# Altium PCB VESC_JLC.PcbDoc (part 3 of 3)
Units mm, origin at the board's own origin, x right, y up, seen from the top; angles counter-clockwise.
Board outline 74.1 x 118 mm, 2 copper layers (Component Side, Bottom Layer), stack 1.571 mm thick; 178 components, 173 nets, 901 pads, 567 vias.
Unrouted connection lines stored in the file: 10.
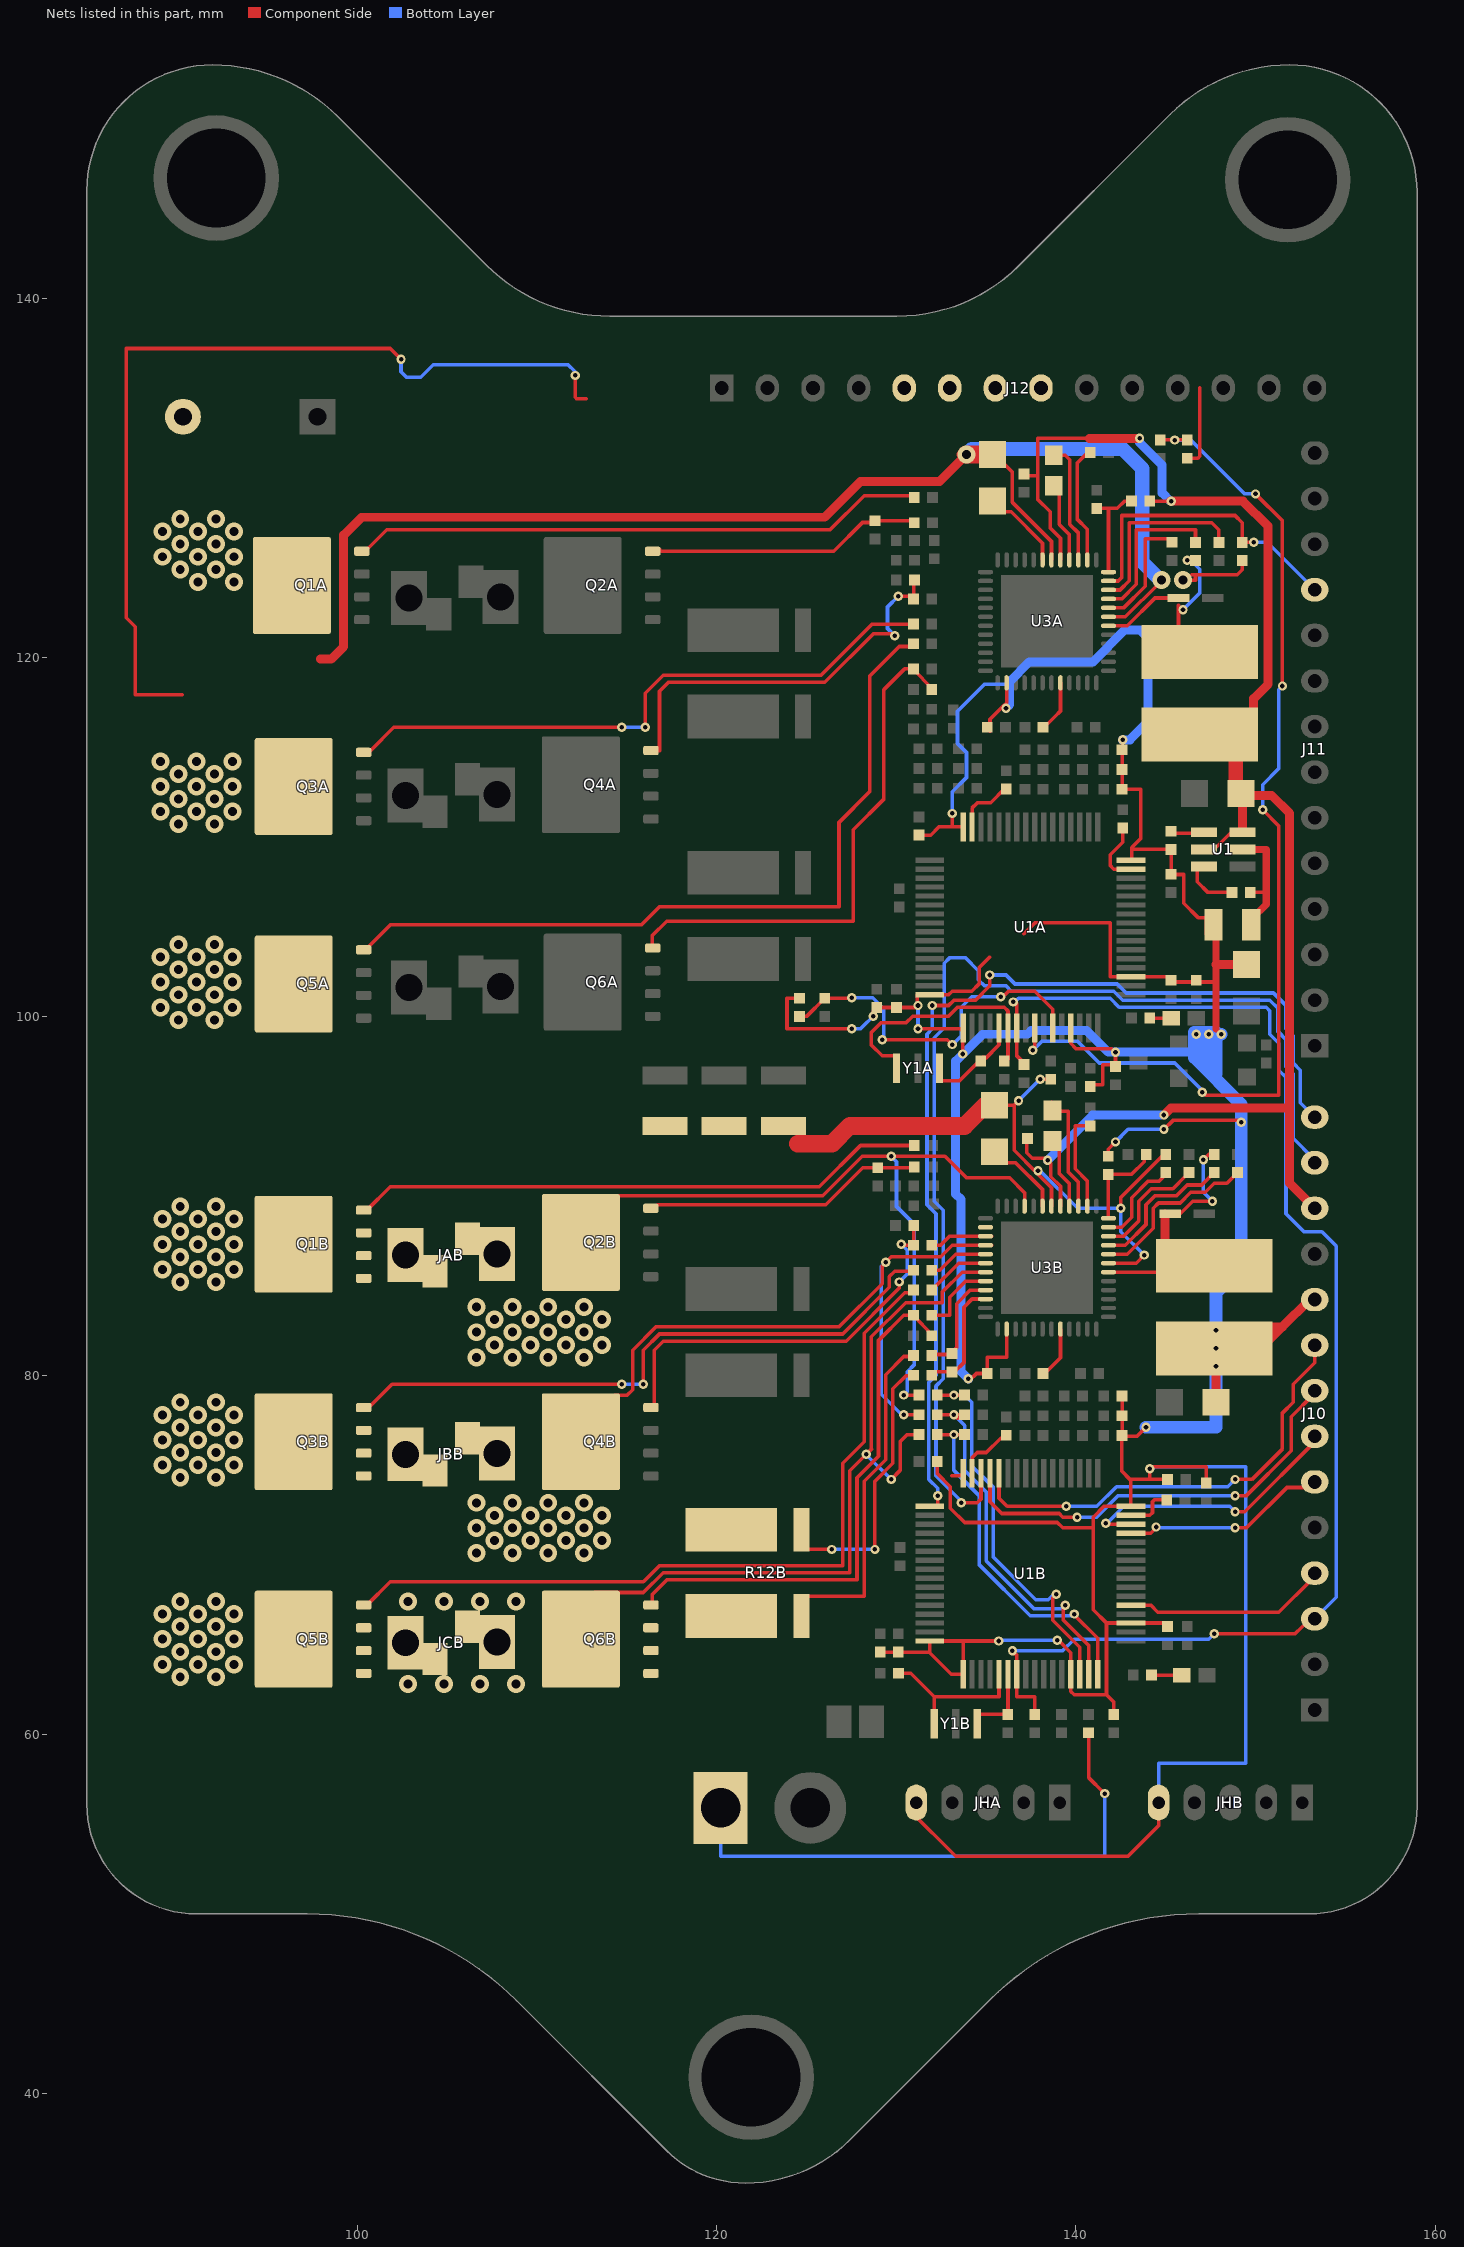
[diagram p3: the nets of this part, all layers, seen from the top]

## Via types
v1: diameter 0.52, hole 0.254, Component Side to Bottom Layer, tented both sides, 284 vias
v2: diameter 1, hole 0.5, Component Side to Bottom Layer, tented both sides, 283 vias

## Nets (pads, with @x,y where several pads share a name; then routed paths per layer and width w, separated by ;. In a path a pad name is that pad's centre, name@x,y a point inside that pad or via, vN(x,y) a via of type N, cw(c..) or ccw(c..) an arc to the next point about the centre after c; other vN are vias at no path point) (continued)
MB_PB_HI: R3B.1 U3B.17 | length 3.4
  Component Side w0.2: R3B.1@131.968,85.85 132.41,85.85 133.31,86.75 U3B.17@134.96,86.75
MB_PB_LO: R4B.1 U3B.15 | length 3.4
  Component Side w0.2: R4B.1@132.068,87.25 132.45,87.25 132.95,87.75 U3B.15@135.31,87.75
MB_PB_SOURCE_F: U3B.14
MB_PC_AGND: R12B.2 R30B.2 | length 14.8
  Component Side w0.2: R12B.2@124.8,70.3 v1(126.4,70.3) ; v1(128.8,70.3) 128.8,74.1 129.8,75.1 129.8,79.256 130.51,79.966 R30B.2@130.952,79.966
  Bottom Layer w0.2: v1(126.4,70.3) v1(128.8,70.3)
MB_PC_AGND_F: C17B.1 R30B.1 U3B.22 | length 6.8
  Component Side w0.2: R30B.1@131.968,80 132.168,80.2 133.25,80.2 133.76,80.71 133.76,82.15 133.76,83.8 134.21,84.25 U3B.22@134.96,84.25 ; C17B.1@133.1,80 C17B.1@133.1,80.2
MB_PC_HI: R5B.1 U3B.18 | length 3.6
  Component Side w0.2: R5B.1@131.968,84.75 133.468,86.25 U3B.18@134.96,86.25
MB_PC_LO: R6B.1 U3B.20 | length 4.4
  Component Side w0.2: R6B.1@131.968,83.35 132.96,83.35 132.96,84.35 133.86,85.25 U3B.20@134.96,85.25
MB_PC_SOURCE: Q6B.1 Q6B.2 Q6B.3 R12B.1 R29B.2 | length 18.2
  Component Side w0.2: R12B.1@124.8,67.7 128.2,67.7 128.2,74.1 129.4,75.3 129.4,80.04 130.41,81.05 R29B.2@130.96,81.05
MB_PC_SOURCE_F: C17B.2 R29B.1 U3B.21 | length 5.7
  Component Side w0.2: R29B.1@132.16,81.158 132.958,81.158 133.35,81.55 133.35,83.99 134.11,84.75 U3B.21@134.96,84.75
MB_PHASE_A: JAB.1 Q1B.1 Q1B.2 Q1B.3 Q2B.5 Q2B.6 Q2B.7 Q2B.8 Q2B.9@112.42,87.4 R23B.2 U3B.9 | length 40.6
  Component Side w0.2: Q2B.9@114.2,89.8 114.4,90 125.9,90 128.1,92.2 v1(129.7,92.2) 132.6,92.2 132.7,92.2 133.9,91 136.302,91 137.135,90.167 U3B.9@137.135,89.425 ; v1@130.502,78.9 v1(130.4,78.9) R23B.2@131.252,78.9
  Bottom Layer w0.2: v1(129.7,92.2) 130,91.9 130,89.4 131,88.4 131,80.6 130.6,80.2 130.6,79.1 v1(130.4,78.9)
  other v2: 106.6,81 108.6,81 110.6,81 112.6,81 107.6,81.7 109.6,81.7 111.6,81.7 113.6,81.7 106.6,82.4 108.6,82.4 110.6,82.4 112.6,82.4 107.6,83.1 109.6,83.1 111.6,83.1 113.6,83.1 106.6,83.8 108.6,83.8 110.6,83.8 112.6,83.8
MB_PHASE_B: JBB.1 Q3B.1 Q3B.2 Q3B.3 Q4B.5 Q4B.6 Q4B.7 Q4B.8 Q4B.9@112.42,76.3 R21B.2 U3B.16 | length 36.8
  Component Side w0.2: Q4B.9@114.3,78.6 114.3,78.9 115,78.9 115.3,79.2 115.3,81.4 116.6,82.7 126.8,82.7 129.2,85.1 129.2,86.1 v1(129.4,86.3) ; v1@129.4,86.418 v1(129.4,86.3) ; v1(130.4,77.8) R21B.2@131.252,77.8 ; U3B.16@135.31,87.25 133.11,87.25 132.46,86.6 129.7,86.6 v1(129.4,86.3)
  Bottom Layer w0.2: v1(129.4,86.3) 129.16,86.06 129.16,78.94 130.3,77.8 v1(130.4,77.8)
  other v2: 106.6,70.1 108.6,70.1 110.6,70.1 112.6,70.1 107.6,70.8 109.6,70.8 111.6,70.8 113.6,70.8 106.6,71.5 108.6,71.5 110.6,71.5 112.6,71.5 107.6,72.2 109.6,72.2 111.6,72.2 113.6,72.2 106.6,72.9 108.6,72.9 110.6,72.9 112.6,72.9
MB_PHASE_C: JCB.1 Q5B.1 Q5B.2 Q5B.3 Q6B.5 Q6B.6 Q6B.7 Q6B.8 Q6B.9@112.42,65.3 R19B.2 U3B.19 | length 43.2
  Component Side w0.2: Q6B.9@112.32,65.92 Q6B.9@113.52,65.92 ; Q6B.9@113.2,67.9 115.9,67.9 117,69 127.4,69 127.4,74.682 v1(128.318,75.6) 128.609,75.891 ; 128.6,75.9 128.6,82.14 130.51,84.05 132.56,84.05 132.56,84.65 133.66,85.75 U3B.19@134.96,85.75 ; v1(129.7,74.2) 130.2,74.7 130.2,76.3 130.6,76.7 R19B.2@131.252,76.7
  Bottom Layer w0.2: v1(128.318,75.6) 128.318,75.582 v1(129.7,74.2)
  other v2: 102.8,62.8 104.8,62.8 106.8,62.8 108.8,62.8 102.8,67.4 104.8,67.4 106.8,67.4 108.8,67.4
MB_RX: J10.7 U1B.30 | length 15.4
  Component Side w0.2: v1@141.76,71.7 U1B.30@143.06,71.7 ; v1(148.86,72.4) 149.4,72.4 153.4,76.4 J10.7@153.4,76.6
  Bottom Layer w0.2: v1(141.66,71.75) 141.71,71.75 142.66,72.7 148.56,72.7 v1(148.86,72.4)
MB_SCK_ADC_EXT: J10.4 U1B.21 | length 11
  Component Side w0.2: U1B.21@143.06,67.2 144.16,67.2 144.56,66.8 151.3,66.8 J10.4@153.1,68.6
MB_SWDCLK: J10.14 U1B.49 | length 57.4
  Component Side w0.2: U1B.49@131.86,72.7 132.3,72.7 v1(132.3,73.3) ; v1(132,100.6) 132.9,100.6 133.2,100.9 134.4,100.9 135.2,101.7 v1(135.2,102.3)
  Bottom Layer w0.2: v1(132,100.6) 132,99.3 131.7,99 131.7,89.5 132.2,89 132.2,84.6 132.2,80 131.8,79.6 131.8,74.2 132.3,73.7 v1(132.3,73.3) ; v1(135.2,102.3) 136.1,102.3 136.6,101.8 142.3,101.8 142.8,101.3 151,101.3 151.7,100.6 151.7,99.3 152.1,98.9 152.1,97.4 152.5,97 152.5,95.18 J10.14@153.3,94.38
MB_SWDIO: J10.13 U1B.46 | length 63.8
  Component Side w0.2: v1(133.6,72.9) 134.5,72.9 134.71,73.11 U1B.46@134.71,74.55
  Bottom Layer w0.2: v1(133.6,72.9) 133.7,72.9 132.2,74.4 132.2,79.4 132.6,79.8 132.6,89.2 132.1,89.7 132.1,98.8 132.66,99.36 132.66,102.96 132.95,103.25 133.85,103.25 134.56,102.54 134.56,102.04 134.9,101.7 136.1,101.7 136.4,101.4 142.1,101.4 142.6,100.9 150.8,100.9 151.25,100.45 151.25,99.15 151.7,98.7 151.7,97.2 152.1,96.8 152.1,93.2 153.2,92.1 J10.13@153.2,91.6
MB_TX: J10.6 U1B.29 | length 11.3
  Component Side w0.2: U1B.29@143.06,71.2 144.16,71.2 v1@144.46,71.5 ; v1(148.86,71.5) 149.5,71.5 151.75,73.75 J10.6@153.25,73.75
  Bottom Layer w0.2: v1(144.46,71.55) 144.46,71.5 v1(148.86,71.5)
MB_USB_DM: J10.9 U1B.44 | length 25.2
  Component Side w0.2: U1B.44@135.71,74.55 135.71,73.15 136.16,72.7 v1(139.46,72.7) ; v1(148.86,74.2) 149.8,74.2 151.5,75.9 151.5,77.9 152.1,78.5 152.1,79.5 153.3,80.7 J10.9@153.3,81.68
  Bottom Layer w0.2: v1(139.46,72.7) 141.16,72.7 142.26,73.8 148.46,73.8 v1(148.86,74.2)
MB_USB_DP: J10.8 U1B.45 | length 23.9
  Component Side w0.2: U1B.45@135.21,74.55 135.21,72.95 135.86,72.3 139.06,72.3 139.26,72.1 v1(140.06,72.1) ; v1(148.86,73.3) 149.5,73.3 152,75.8 152,77.7 J10.8@153.2,78.9
  Bottom Layer w0.2: v1(140.06,72.1) 141.16,72.1 142.36,73.3 v1(148.86,73.3)
MB_VOLTAGE_A: R23B.1 R24B.2 U1B.14 | length 21.7
  Component Side w0.2: R23B.1@132.268,78.9 v1@133.4,78.9 ; v1(133.2,78.9) v1@133.4,78.9 ; R24B.2@133.942,78.9 v1@133.4,78.9 ; v1(138.9,67.8) 138.7,67.6 138.7,66.36 140.21,64.85 U1B.14@140.21,63.45
  Bottom Layer w0.2: v1(133.2,78.9) 133.8,78.9 134.2,78.5 134.2,74.95 135.4,73.75 135.4,69.86 137.76,67.5 138.46,67.5 v1@138.76,67.8
MB_VOLTAGE_B: R21B.1 R22B.2 U1B.15 | length 21.7
  Component Side w0.2: R21B.1@132.218,77.766 132.252,77.8 R21B.1@132.268,77.8 132.318,77.75 132.368,77.8 v1@133.4,77.8 ; R22B.2@133.942,77.8 133.892,77.75 R22B.2@133.842,77.8 ; v1(139.4,67.2) 139.3,67.3 139.3,66.36 140.71,64.95 U1B.15@140.71,63.45 ; v1@133.4,77.8 133.4,77.6 133.721,77.921 R22B.2@133.842,77.8 ; v1@133.4,77.8 R22B.2@133.792,77.8 R22B.2@133.842,77.8
  Bottom Layer w0.2: v1@133.3,77.8 133.3,77.7 133.8,77.2 133.8,74.7 135,73.5 135,69.66 137.66,67 139.2,67 v1(139.4,67.2)
  other v1: 133.2,77.8
MB_VOLTAGE_C: R19B.1 R20B.2 U1B.16 | length 19.7
  Component Side w0.2: R19B.1@132.218,76.666 R19B.1@132.252,76.7 ; R19B.1@132.26,76.692 R19B.1@132.252,76.7 ; R20B.2@133.742,76.7 R19B.1@132.268,76.7 R19B.1@132.252,76.7 ; v1@139.86,66.7 v1(139.9,66.7) ; v1@139.88,66.68 141.21,65.35 U1B.16@141.21,63.45
  Bottom Layer w0.2: v1(133.2,76.7) 133.2,74.7 134.6,73.3 134.6,69.46 137.46,66.6 139.8,66.6 v1(139.9,66.7)
NetC1A_1: C1A.1 U1A.5 Y1A.3 | length 6.1
  Component Side w0.2: Y1A.3@132.5,97.3 132.5,96.4 133.5,96.4 C1A.1@134.808,97.708 ; C1A.1@134.9,97.708 134.955,97.653 135.71,98.408 U1A.5@135.71,99.35 U1A.5@135.71,99.65
NetC1B_1: C1B.1 U1B.5 Y1B.3 | length 9.1
  Component Side w0.2: C1B.1@130.108,63.4 130.8,63.4 132.1,62.1 ; Y1B.3@132.1,60.4 132.1,62.1 ; U1B.5@135.71,63.35 135.71,62.1 132.1,62.1
NetC2A_1: C2A.1 U1A.6 Y1A.1 | length 13.8
  Component Side w0.2: Y1A.1@130.1,97.4 130.1,97.8 129.2,97.8 128.6,98.4 128.6,99.1 129.15,99.65 130.55,99.65 130.9,100 132.9,100 133.4,100.5 136,100.5 136.21,100.29 U1A.6@136.21,99.35 C2A.1@136.21,97.6
NetC2B_1: C2B.1 U1B.6 Y1B.1 | length 4.4
  Component Side w0.2: Y1B.1@134.5,60.65 134.5,61.108 C2B.1@136.2,61.108 ; C2B.1@136.21,61.108 U1B.6@136.21,63.35
NetC11A_1: C11A.1 U1A.31 | length 3.5
  Component Side w0.2: C11A.1@142.6,110.392 142.6,109.7 141.9,109 141.9,108.4 142.1,108.2 U1A.31@143.06,108.2
NetC11B_1: C11B.1 U1B.31 | length 2.6
  Component Side w0.2: U1B.31@143.06,72.2 144.11,72.2 144.26,72.35 144.26,72.95 144.368,73.058 C11B.1@144.96,73.058
NetC18A_1: C18A.1 U3A.2 | length 6.5
  Component Side w0.2: U3A.2@140.635,125.425 140.635,127.125 140.06,127.7 140.06,130.808 C18A.1@140.66,131.408
NetC18B_1: C18B.1 U3B.2 | length 5.5
  Component Side w0.2: U3B.2@140.635,89.425 140.635,90.825 139.96,91.5 139.96,93.9 C18B.1@140.7,93.9
NetC19A_1: C19A.1 U3A.3 | length 6.8
  Component Side w0.2: C19A.1@138.76,131.25 139.41,131.25 139.66,131 139.66,127.4 140.135,126.925 U3A.3@140.135,125.425
NetC19A_2: C19A.2 U3A.4 | length 4.4
  Component Side w0.2: C19A.2@139.06,129.55 139.06,127.4 139.635,126.825 U3A.4@139.635,125.425
NetC19B_1: C19B.1 U3B.3 | length 6.6
  Component Side w0.2: C19B.1@138.66,95.2 139.16,94.7 139.56,94.7 139.56,91.325 140.135,90.75 U3B.3@140.135,89.425
NetC19B_2: C19B.2 U3B.4 | length 4.1
  Component Side w0.2: C19B.2@139.06,93.3 139.06,91.242 139.635,90.667 U3B.4@139.635,89.425
NetC20A_2: C20A.2 U3A.7 | length 4.5
  Component Side w0.2: C20A.2@135.452,128.455 135.807,128.1 136.385,128.1 138.135,126.35 U3A.7@138.135,125.425
NetC20B_2: C20B.2 U3B.7 | length 4.5
  Component Side w0.2: C20B.2@135.452,92.455 136.057,91.85 136.635,91.85 138.135,90.35 U3B.7@138.135,89.425
NetC21A_1: C21A.1 U3A.45 | length 8.9
  Component Side w0.2: U3A.45@141.81,123.25 142.55,123.25 143.36,124.06 143.36,127.1 146.66,127.1 C21A.1@146.66,126.4
NetC21A_2: C21A.2 D3A.2 L1A.1 U3A.42 | length 9.8
  Component Side w0.2: U3A.42@141.81,121.75 142.85,121.75 144.4,123.3 D3A.2@145.71,123.3 ; L1A.1@145.71,121.15 145.71,122.9
  Bottom Layer w0.2: v1(145.96,122.64) 146.9,123.58 146.9,124.9 146.4,125.4 v1(146.2,125.4)
NetC21B_1: C21B.1 U3B.45 | length 8.1
  Component Side w0.2: U3B.45@141.81,87.25 142.75,87.25 143.9,88.4 143.9,89.5 144.4,90 145.6,90 146.2,90.6 147,90.6 147.492,91.092 C21B.1@147.7,91.092
NetC21B_2: C21B.2 D3B.2 L1B.1 U3B.42 | length 14.3
  Component Side w0.2: U3B.42@141.81,85.75 L1B.1@147.35,85.75 ; D3B.2@145.25,89 145.8,89 146.5,89.7 v1(147.6,89.7) ; v1(147.1,92) 147.408,92.308 C21B.2@147.7,92.308
  Component Side w0.5: L1B.1@144.95,86.1 144.95,88.2 D3B.2@144.95,89
  Bottom Layer w0.2: v1(147.1,92) 147.1,90.2 v1(147.6,89.7)
NetC22A_2: C22A.2 U3A.44 | length 6.9
  Component Side w0.2: U3A.44@141.81,122.75 142.65,122.75 143.86,123.96 143.86,126.6 145.26,126.6 C22A.2@145.46,126.4
NetC22B_2: C22B.2 U3B.44 | length 9.7
  Component Side w0.2: U3B.44@141.81,86.75 142.85,86.75 144.3,88.2 144.3,89.3 144.6,89.6 145.8,89.6 146.4,90.2 147.2,90.2 147.7,90.7 148.408,90.7 C22B.2@149,91.292
NetC30A_1: C30A.1 U1A.47 | length 3.4
  Component Side w0.2: U1A.47@134.21,110.55 134.21,111.6 134.51,111.9 135.244,111.9 136.002,112.658 C30A.1@136.11,112.658
NetC30B_1: C30B.1 U1B.47 | length 3.3
  Component Side w0.2: U1B.47@134.21,74.55 134.21,75.41 134.5,75.7 135,75.7 135.8,76.5 135.952,76.5 C30B.1@136.11,76.658
NetC41A_1: C41A.1 L1.2 U1.2 | length 6.1
  Component Side w0.2: C41A.1@149.908,106.9 150.5,106.9
  Component Side w0.4: U1.2@149.275,109.3 150.6,109.3 150.6,106.233 L1.2@149.808,105.441
NetC41A_2: C41A.2 U1.6 | length 3.5
  Component Side w0.2: U1.6@147.125,108.35 146.75,108.35 146.75,107.5 147.35,106.9 C41A.2@148.692,106.9 C41A.2@148.792,106.9
NetD1A_1: D1A.1 R32A.1 | length 1.2
  Component Side w0.2: R32A.1@144.108,99.9 D1A.1@145.3,99.9
NetD1B_1: D1B.1 R32B.1 | length 1.7
  Component Side w0.2: R32B.1@144.208,63.3 D1B.1@145.9,63.3
NetQ1A_4: Q1A.4 R1A.2 | length 32.1
  Component Side w0.2: Q1A.4@100.22,125.905 100.405,125.905 101.6,127.1 126.3,127.1 128.2,129 130.892,129 R1A.2@130.992,128.9
NetQ1B_4: Q1B.4 R1B.2 | length 32.1
  Component Side w0.2: Q1B.4@100.32,89.205 100.505,89.205 101.8,90.5 125.7,90.5 128,92.8 R1B.2@130.894,92.8
NetQ2A_4: Q2A.4 R2A.2 R7A.2 | length 15.2
  Component Side w0.2: Q2A.4@116.8,126 116.9,125.9 126.5,125.9 128.108,127.508 128.608,127.508 R7A.2@128.8,127.7 ; R7A.2@128.608,127.7 128.708,127.6 130.894,127.6 R2A.2@130.944,127.55
NetQ2B_4: Q2B.4 R2B.2 R7B.2 | length 15.6
  Component Side w0.2: Q2B.4@116.22,89.305 116.5,89.305 116.695,89.5 126.06,89.5 128.118,91.558 R7B.2@128.952,91.558 R2B.2@130.936,91.558
NetQ3A_4: Q3A.4 R3A.2 | length 34.6
  Component Side w0.2: Q3A.4@100.52,114.805 100.705,114.805 102,116.1 v1(114.7,116.1) ; v1@115.9,116.1 116,116.2 116,118 117,119 125.8,119 128.65,121.85 R3A.2@130.952,121.85 R3A.2@131.052,121.95
  Bottom Layer w0.2: v1(114.7,116.1) v1(116,116.1)
NetQ3B_4: Q3B.4 R3B.2 | length 35.5
  Component Side w0.2: Q3B.4@100.32,78.205 100.605,78.205 101.9,79.5 v1(114.7,79.5) ; v1@115.8,79.6 v1(115.9,79.5) 115.9,81.4 116.8,82.3 127,82.3 129.6,84.9 129.6,85.5 129.9,85.8 R3B.2@130.902,85.8 ; R3B.2@130.952,85.85 R3B.2@131.052,85.95
  Bottom Layer w0.2: v1(114.7,79.5) v1(115.9,79.5)
NetQ4A_4: Q4A.4 R4A.2 R8A.2 | length 22.7
  Component Side w0.2: Q4A.4@116.52,114.805 116.8,114.805 116.8,118.1 117.3,118.6 126,118.6 128.7,121.3 129.8,121.3 v1(129.9,121.2) ; v1(130.1,123.4) 130.802,123.4 R4A.2@130.952,123.25 130.968,123.25 R8A.2@130.968,124.35
  Bottom Layer w0.2: v1(129.9,121.2) 129.5,121.6 129.5,122.8 v1(130.1,123.4)
NetQ4B_4: Q4B.4 R4B.2 R8B.2 | length 23.2
  Component Side w0.2: Q4B.4@116.22,78.205 116.5,78.205 116.5,81.4 117,81.9 127.2,81.9 130.16,84.86 v1(130.16,85.2) ; v1@130.26,87.2 130.31,87.25 R4B.2@130.952,87.25 130.952,88.334 R8B.2@130.968,88.35
  Bottom Layer w0.2: v1(130.16,85.2) 130.6,85.64 130.6,86.96 v1(130.26,87.3)
NetQ5A_4: Q5A.4 R5A.2 | length 44
  Component Side w0.2: Q5A.4@100.52,103.805 101.815,105.1 115.8,105.1 116.8,106.1 126.8,106.1 126.8,110.8 128.5,112.5 128.5,118.94 130.16,120.6 131.002,120.6 R5A.2@131.052,120.65
NetQ5B_4: Q5B.4 R5B.2 | length 44.9
  Component Side w0.2: Q5B.4@100.32,67.205 100.505,67.205 101.802,68.502 115.902,68.502 116.8,69.4 127,69.4 127,75.1 128.2,76.3 128.2,82.34 130.46,84.6 130.802,84.6 R5B.2@130.952,84.75 ; R5B.2@130.952,84.65 R5B.2@131.052,84.65
NetQ6A_4: Q6A.4 R6A.2 R9A.2 | length 29.1
  Component Side w0.2: Q6A.4@116.42,103.805 116.4,103.825 116.4,104.5 117.2,105.3 127.6,105.3 127.6,110.4 129.3,112.1 129.3,118.2 130.45,119.35 130.652,119.35 ; R6A.2@130.968,119.333 R9A.2@131.96,118.25
NetQ6B_4: Q6B.4 R6B.2 R9B.2 | length 30.4
  Component Side w0.2: Q6B.4@116.22,67.205 116.405,67.205 116.405,67.805 117.2,68.6 127.8,68.6 127.8,74.3 129,75.5 129,81.94 130.41,83.35 R6B.2@130.952,83.35 130.968,83.333 R9B.2@131.96,82.25
NetR33A_2: R33A.2 R34A.1 U3A.48 | length 5.6
  Component Side w0.2: R33A.2@141.16,128.3 141.81,128.3 ; U3A.48@141.81,124.75 141.81,128.3 ; R34A.1@143.092,128.7 142.7,128.7 142.3,128.3 141.81,128.3
NetR33B_2: R33B.2 R34B.1 U3B.48 | length 4.9
  Component Side w0.2: U3B.48@141.8,88.76 R34B.1@141.8,91.192 143.092,91.192 143.8,91.9 R33B.2@143.8,92.1
NetR36A_1: R36A.1 U3A.46 | length 10.5
  Component Side w0.2: U3A.46@141.81,123.75 142.45,123.75 142.96,124.26 142.96,127.5 147.56,127.5 147.96,127.1 R36A.1@147.96,126.4
NetR36B_1: R36B.1 U3B.46 | length 6.5
  Component Side w0.2: U3B.46@141.81,87.75 142.65,87.75 143.5,88.6 143.5,89.7 144.2,90.4 145.4,90.4 146.092,91.092 R36B.1@146.3,91.092
NetR37A_1: R37A.1 U3A.32 | length 2.9
  Component Side w0.2: R37A.1@138.176,116.05 138.818,116.692 139.135,117.009 U3A.32@139.135,118.575
NetR37B_1: R37B.1 U3B.32 | length 3
  Component Side w0.2: R37B.1@138.176,80.05 138.176,80.2 138.36,80.2 139.135,80.975 U3B.32@139.135,82.575
NetR42A_2: R42A.2 U1.4 | length 1.6
  Component Side w0.2: R42A.2@145.5,110.208 U1.4@147.083,110.208
NRST: C3A.1 C3B.1 J10.3 U1A.7 U1B.7 | length 77.7
  Component Side w0.2: v1@136.5,64.6 136.71,64.39 U1B.7@136.71,63.35 136.71,62.1 137.7,62.1 C3B.1@137.7,61.108 ; v1(136.5,100.8) 136.6,100.8 136.71,100.69 U1A.7@136.71,99.35 136.71,97.79 C3A.1@137.2,97.3 ; U1B.7@136.702,63.65 U1B.7@136.702,63.825 ; U1A.7@136.702,99.65 U1A.7@136.702,99.825 ; v1(147.7,65.6) 152.2,65.6 152.6,66 J10.3@153.3,66.7
  Bottom Layer w0.2: v1(136.46,64.65) 139.25,64.65 139.9,65.3 147.4,65.3 v1(147.7,65.6) ; v1(136.5,100.8) 136.5,100.7 136.8,101 141.9,101 142.4,100.5 150.6,100.5 150.8,100.3 150.8,99 151.3,98.5 151.3,97 151.7,96.6 151.7,89 152.7,88 153.7,88 154.5,87.2 154.5,67.64 J10.3@153.3,66.44
NTC_M: R10.1 R11.2 U1A.11 | length 20.4
  Component Side w0.2: R10.1@124.6,99.992 124.992,99.992 R11.2@126,101 ; R11.2@126,101.008 v1@127.492,101.008 ; v1(129.2,98.7) 132.827,98.7 v1(133.1,98.427) ; v1@135.815,100.971 136.245,101.4 137.7,101.4 138.71,100.39 U1A.11@138.71,99.35
  Bottom Layer w0.2: v1(127.5,101.027) 128.673,101.027 129.3,100.4 v1@129.3,98.727 ; v1@133.1,98.4 133.6,98.9 133.6,100.5 134.198,101.098 v1(135.815,101.098)
V_CHG: C39.2 J12.5 J12.6 J12.7 J12.8 Q1A.5 Q1A.6 Q1A.7 Q1A.8 Q1A.9@96.32,124 R5.2 | length 4.5
  Component Side w0.2: R5.2@146.2,131.092 146.792,131.092 146.9,131.2 146.9,135
  other v2: 91.1,124.2 93.1,124.2 90.1,124.9 92.1,124.9 89.1,125.6 91.1,125.6 93.1,125.6 90.1,126.3 92.1,126.3 89.1,127 91.1,127 93.1,127 90.1,127.7 92.1,127.7
V_CHG_SNS: R5.1 R6.2 U1A.9 | length 58.7
  Component Side w0.2: v1@137.6,98.2 137.71,98.31 U1A.9@137.71,99.35 ; R6.2@144.7,132.108 R5.1@146.2,132.108 ; v1(147.034,95.775) 147.209,95.6 151.3,95.6 151.3,110.6 v1(150.4,111.5) ; v1(150,129.1) 151.5,127.6 v1(151.5,118.4)
  Bottom Layer w0.2: v1(137.6,98.1) 138.1,98.6 140.1,98.6 141.3,97.4 145.5,97.4 v1@147.08,95.82 ; v1@145.4,132.1 v1(145.5,132.1) 146.4,132.1 149.4,129.1 v1(150,129.1) ; v1(150.4,111.5) 150.4,112.9 151.3,113.8 151.3,118.2 v1(151.5,118.4)
V_SUPPLY: C20A.1 C20B.1 C35A.2 C36A.2 C37A.2 JB.2 Q1B.5 Q1B.6 Q1B.7 Q1B.8 Q1B.9@96.42,87.3 Q3A.5 Q3A.6 Q3A.7 Q3A.8 Q3A.9@96.42,112.8 Q3B.5 Q3B.6 Q3B.7 Q3B.8 Q3B.9@96.42,76.3 Q5A.5 Q5A.6 Q5A.7 Q5A.8 Q5A.9@96.42,101.8 Q5B.5 Q5B.6 Q5B.7 Q5B.8 Q5B.9@96.42,65.3 R35A.2 R35B.2 R38A.2 R38B.2 U3A.6 U3A.43 U3B.6 U3B.43 | length 198.6
  Component Side w0.2: 90.2,117.92 87.6,117.92 87.6,121.7 87.1,122.2 87.1,137.2 101.8,137.2 v1(102.4,136.6) ; v1(112.1,135.7) 112.1,134.492 112.2,134.392 112.708,134.392 ; C20B.1@135.302,95.2 C20B.1@135.452,95.05 ; C20B.1@135.452,95.045 C20B.1@135.452,95.05 ; C20A.1@135.452,131.045 135.715,131.045 136.46,130.3 136.46,128.625 138.635,126.45 U3A.6@138.635,125.425 ; v1(136.8,95.3) 136.55,95.05 C20B.1@135.452,95.05 ; v1(137.885,91.4) v1@137.785,91.3 ; v1@138.008,96.492 R38A.2@138.6,96.492 ; U3B.6@138.635,89.425 138.635,90.45 v1@137.785,91.3 ; R38B.2@140.7,60.092 140.7,57.6 141.55,56.75 v1@141.75,56.75 ; U3B.43@141.81,86.25 143.35,86.25 v1(143.8,86.7) ; U3A.43@141.81,122.25 142.75,122.25 144.63,124.13 v2@144.63,124.17 ; v1(142.5,89.3) 142.5,89.908 142.8,90.208 ; 142.8,90.2 142.8,90.208 ; R35B.2@144.9,92.308 142.8,90.208 ; v2(145.96,124.3) 146.66,124.3 146.66,124.6 ; 146.46,124.6 146.66,124.6 ; R35A.2@149.26,125.384 149.26,124.884 148.976,124.6 146.66,124.6 ; C20B.1@135.452,95.05 135.454,95.048 135.457,95.045 136.552,95.045 136.552,92.533 v1@137.785,91.3
  Component Side w0.5: 97.9,119.9 98.5,119.9 99.2,120.6 99.2,126.8 100.2,127.8 126,127.8 128,129.8 132.4,129.8 v2@133.75,131.15 ; v2@133.6,131.3 v2@133.75,131.15 ; v2(133.9,131.3) v2@133.75,131.15
  Component Side w1: 124.5,92.9 126.4,92.9 127.4,93.9 133.8,93.9 134.945,95.045 C20B.1@135.452,95.045 ; v2(133.9,131.3) C20A.1@135.36,131.295 ; C20B.1@135.454,95.048 C20B.1@135.452,95.045 ; C20B.1@135.457,95.045 C20B.1@135.452,95.045
  Bottom Layer w0.2: v1(102.4,136.6) 102.4,135.9 102.7,135.6 103.5,135.6 104.2,136.3 111.7,136.3 112.1,135.9 v1(112.1,135.7) ; JB.2@120.2,55.9 120.2,53.2 141.5,53.2 141.6,53.3 v1(141.6,56.7) ; v1(136.8,95.3) v1(138,96.5) ; v1(137.885,91.4) 138,91.4 140.1,89.3 v1(142.5,89.3) 142.5,88 v1(143.8,86.7)
  Bottom Layer w0.8: v2(133.9,131.3) 134.2,131.6 142.6,131.6 143.7,130.5 143.7,125.3 v2@144.68,124.32
  other v2: 90.1,63.2 92.1,63.2 89.1,63.9 91.1,63.9 93.1,63.9 90.1,64.6 92.1,64.6 89.1,65.3 91.1,65.3 93.1,65.3 90.1,66 92.1,66 89.1,66.7 91.1,66.7 93.1,66.7 90.1,67.4 92.1,67.4 90.1,74.3 92.1,74.3 89.1,75 91.1,75 93.1,75 90.1,75.7 92.1,75.7 89.1,76.4 91.1,76.4 93.1,76.4 90.1,77.1 92.1,77.1 89.1,77.8 91.1,77.8 93.1,77.8 90.1,78.5 92.1,78.5 90.1,85.2 92.1,85.2 89.1,85.9 91.1,85.9 93.1,85.9 90.1,86.6 92.1,86.6 89.1,87.3 91.1,87.3 93.1,87.3 90.1,88 92.1,88 89.1,88.7 91.1,88.7 93.1,88.7 90.1,89.4 92.1,89.4 90,99.8 92,99.8 89,100.5 91,100.5 93,100.5 90,101.2 92,101.2 89,101.9 91,101.9 93,101.9 90,102.6 92,102.6 89,103.3 91,103.3 93,103.3 90,104 92,104 90,110.7 92,110.7 89,111.4 91,111.4 93,111.4 90,112.1 92,112.1 89,112.8 91,112.8 93,112.8 90,113.5 92,113.5 89,114.2 91,114.2 93,114.2 144.76,124.3
VCC_3V3: C4A.1 C4B.1 C5A.1 C5B.1 C6A.1 C6B.1 C7A.1 C7B.1 C8A.1 C8B.1 C9A.1 C9B.1 C10A.1 C10B.1 C33B.1 C34A.1 C34B.1 C40A.1 J10.10 JHA.5 JHB.5 L1.1 L1B.2 R10.2 R13A.2 R13B.2 R14A.2 R14B.2 R15A.2 R15B.2 R34B.2 R41A.2 R42A.1 U1A.1 U1A.13 U1A.19 U1A.32 U1A.48 U1A.64 U1B.1 U1B.13 U1B.19 U1B.32 U1B.48 U1B.64 U3A.26 U3B.26 | length 303.6
  Component Side w0.2: R10.2@124.6,101.008 123.9,101.008 123.9,99.3 v1(127.5,99.3) ; v1(128.7,100) 128.7,100.292 C4A.1@128.9,100.492 ; C4A.1@128.9,100.692 C4A.1@128.908,100.692 ; C4A.1@128.9,100.7 C4A.1@128.908,100.692 ; C4A.1@128.908,100.492 C7A.1@130,100.492 v1@131.008,100.492 ; C4A.1@129,100.6 C4A.1@128.908,100.692 ; C4B.1@129.1,64.584 C7B.1@130.1,64.584 131.844,64.584 ; JHA.5@130.75,56.15 130.75,55.75 133.3,53.2 142.9,53.2 144.6,54.9 144.6,55.9 JHB.5@144.35,56.15 ; v1(131.2,99.3) 133.56,99.3 133.66,99.2 133.76,99.3 U1A.1@133.71,99.35 133.7,99.34 v1(133.7,97.9) ; v1(131.2,100.6) 131.16,100.6 131.16,101.2 U1A.64@131.86,101.2 132.9,101.2 133.1,101.4 134.2,101.4 134.6,101.8 134.6,102.7 135.2,103.3 ; C6A.1@131.26,110.092 131.902,110.092 132.36,110.55 133.1,110.55 ; C6B.1@132.268,75.2 132.268,74.532 133,73.8 133,72.6 133.8,71.8 138.96,71.8 139.26,71.5 140.96,71.5 ; 133.068,74.4 133.56,74.4 U1B.48@133.71,74.55 ; v1(133.1,111.3) 133.1,110.55 ; 133.71,65.19 U1B.1@133.71,63.35 133.05,63.35 131.86,64.54 U1B.64@131.86,65.2 v1(135.7,65.2) ; U1A.48@133.71,110.55 133.1,110.55 ; v1@134.06,79.7 134.46,80.1 C34B.1@135.002,80.1 ; C34A.1@134.96,116.142 C34A.1@135.21,115.892 ; C34A.1@134.968,116.042 135.21,116.284 135.21,116.55 v1@135.96,117.3 ; C34B.1@135.21,79.892 135.027,80.075 135.014,80.088 C34B.1@135.002,80.1 ; v1(136.1,117.16) v1@135.96,117.3 ; U3B.26@136.135,82.575 136.135,81 135.052,81 C34B.1@135.052,80.1 C34B.1@135.002,80.1 ; U3A.26@136.135,118.575 136.135,117.475 v1@135.96,117.3 ; 137.1,104.6 137.7,105.2 141.9,105.2 141.9,102.2 U1A.19@143.06,102.2 145.102,102.2 C8A.1@145.3,102.2 ; v1@138.96,65.2 139.06,65.2 139.71,64.55 U1B.13@139.71,63.35 139.71,62.39 139.9,62.2 141.7,62.2 ; U1A.13@139.71,99.35 139.71,98.49 140,98.2 142,98.2 v1(142.2,98) C5A.1@142.2,97.508 ; C9A.1@140.996,96.196 141.5,96.196 141.5,97.3 141.992,97.3 C5A.1@142.1,97.408 ; R34B.2@141.8,92.208 141.8,92.6 v1(142.2,93) ; C9B.1@142.1,61.358 142.1,61.8 141.7,62.2 ; R13A.2@142.56,112.642 R13A.2@142.568,112.65 ; R15A.2@142.568,114.932 R15A.2@142.568,114.85 ; v1(142.6,115.4) 142.6,114.882 R15A.2@142.568,114.85 ; U1A.32@143.1,108.8 143.1,109.4 143.6,109.9 143.6,112.65 R13A.2@142.568,112.65 ; 143.16,109.308 R42A.1@145.4,109.308 ; v1(143.9,77.1) 143.4,76.6 142.568,76.6 R15B.2@142.568,78.85 R13B.2@142.568,76.65 142.56,76.642 142.56,74.65 143.01,74.2 143.11,74.2 ; v1(144.9,93.7) 145.4,94.2 149.1,94.2 v1(149.2,94.1) ; C8B.1@144.96,66.058 144.818,66.2 U1B.19@143.06,66.2 141.7,66.2 ; C5B.1@145.052,74.2 144.1,74.2 ; 145.3,108.992 145.3,107.9 146,107.9 146,106.3 146.8,105.5 L1.1@147.559,105.5 ; C8A.1@145.492,101.908 147.892,101.908 ; C10B.1@147.26,74.008 147.26,74.9 144.2,74.9 v1(144.1,74.8) 144.1,74.24 ; 140.96,71.5 140.96,66.94 141.7,66.2 ; 140.96,71.5 140.96,72.1 141.56,72.7 U1B.32@143.06,72.7 143.06,74.15 143.11,74.2 ; 141.7,62.2 141.7,66.2 ; R13A.2@142.568,112.65 R14A.2@142.568,113.75 R15A.2@142.568,114.85 ; 143.11,74.2 144.06,74.2 ; 144.06,74.2 144.1,74.2 ; 144.06,74.2 144.1,74.24 ; 144.1,74.2 144.1,74.24
  Component Side w0.4: 147.8,99.3 L1.1@147.8,104.4
  Component Side w0.5: L1B.2@147.7,81.5 L1B.2@147.795,81.5 ; C33B.1@147.795,78.5 L1B.2@147.795,81.5 ; 147.805,102.895 C40A.1@149.5,102.895 ; 151.1,82.3 150.7,82.3 150.5,82.5 150.5,82.7 151.5,82.7 ; J10.10@153.3,84.22 153.02,84.22 151.5,82.7 ; L1B.2@147.795,81.5 v1(147.8,81.5) 150.3,81.5 151.5,82.7
  Component Side w0.8: L1.1@147.559,104.641 L1.1@147.559,105.5
  Bottom Layer w0.2: v1(127.5,99.3) 128,99.3 128.1,99.4 v1(128.7,100) ; v1(131.2,100.6) v1(131.2,99.3) ; v1(133.1,111.3) 133.1,112.5 133.9,113.3 133.9,114.7 133.4,115.2 133.4,117 134.9,118.5 136.15,118.5 ; v1(135.7,65.2) 135.75,65.25 v1(138.96,65.25) ; v1(142.2,93) 142.9,93.7 v1(144.9,93.7) ; v1@144.06,74.8 v1(144.1,74.8) ; v1@144.26,74.8 144.36,74.9 149.46,74.9 149.46,58.4 144.6,58.4 144.6,55.64 JHB.5@144.4,55.44 ; v1(131.2,99.3) 131.1,99.2 v1(131.2,99.3)
  Bottom Layer w0.5: v1(134,79.8) 133.6,80.2 133.6,89.8 133.3,90.1 133.3,97.5 134.8,99 137.3,99 137.5,99.2 140.6,99.2 141.8,98 v1(142.2,98) 146.6,98 ; v1(136.1,117.16) 136.3,117.36 136.3,118.65 137.4,119.75 140.95,119.75 142.725,121.525 143.56,121.525 144,121.085 144,116.4 143,115.4 v1(142.6,115.4)
  Bottom Layer w0.7: v1(143.9,77.1) 147.8,77.1 v1(147.8,80.5) v1(147.8,81.5) v1(147.8,82.5) 147.8,84.6 149.2,86 149.2,95.1 146.6,97.7 146.6,98 ; 146.544,98.056 146.6,98 ; 147.187,97.7 147.2,97.713 147.2,98.9 147.3,99 v1(147.4,99) ; 147.35,97.25 146.6,98 ; 147.8,96.8 147.8,99.1 ; v1(148.1,99) 147.9,99 147.8,99.1 ; 146.6,98 146.6,99.1 147.8,99.1
  other v1: 146.7,99
VCC_12V: C33A.1 C38A.1 C38B.1 J10.12 L1A.2 R34A.2 U1.3 U1.5 U3A.5 U3B.5 | length 91.5
  Component Side w0.2: C38A.1@137.16,130.108 137.852,130.108 ; C38B.1@137.26,93.292 137.26,92.4 137.56,92.1 138.3,92.1 138.6,91.8 138.6,91.06 139.135,90.525 U3B.5@139.135,89.425 ; U3A.5@139.135,125.425 139.135,126.625 138.56,127.2 138.56,128.1 137.86,128.8 137.86,132.2 140.76,132.2 ; R34A.2@144.108,128.7 v1@145.26,128.7 ; U1.5@147.129,109.3 147.7,109.3 148.65,110.25 U1.3@149.275,110.25
  Component Side w0.5: 140.76,132.2 v1@143.4,132.2 ; v1(144.9,94.5) 145.3,94.9 151.7,94.9 ; v1@145.26,128.7 149.3,128.7 150.7,127.3 150.7,118.5 149.9,117.7 149.9,116.9 L1A.2@148,116.9 ; U1.3@149.275,110.25 C33A.1@149.275,112.42 ; C33A.1@149.395,112.3 150.9,112.3 151.9,111.3 151.9,90.7 J10.12@153.3,89.3
  Component Side w0.8: C33A.1@148.895,112.5 L1A.2@148.895,116.695
  Bottom Layer w0.5: v1(138.415,91.985) 140.93,94.5 v1(144.9,94.5) ; v1(143.54,132.2) 143.54,131.96 144.8,130.7 144.8,129.16 v1@145.26,128.7
  other v1: 145.3,128.7
VCC_12V_SD: J11.11 R35A.1 U3A.47 | length 17.5
  Component Side w0.2: U3A.47@141.81,124.25 142.35,124.25 142.56,124.46 142.56,127.9 148.86,127.9 149.26,127.5 R35A.1@149.26,126.4 v1@150,126.4
  Bottom Layer w0.2: v1(149.9,126.4) 150.66,126.4 J11.11@153.3,123.76
VCC_NV_SD: R35B.1 U3B.47 | length 4.9
  Component Side w0.2: U3B.47@141.81,88.25 142.55,88.25 143.1,88.8 143.1,89.9 144,90.8 144.608,90.8 R35B.1@144.9,91.092
pads on no net: J12.9 J12.10 J12.11 J12.12 Q1A.9@95.635,122.67 Q1A.9@95.635,124 Q1A.9@95.635,125.33 Q1A.9@96.65,124 Q1A.9@96.785,122.67 Q1A.9@96.785,124 Q1A.9@96.785,125.33 Q1A.9@97.935,122.67 Q1A.9@97.935,124 Q1A.9@97.935,125.33 Q1A.9@98.23,121.628 Q1A.9@98.23,126.373 Q1B.9@95.735,85.97 Q1B.9@95.735,87.3 Q1B.9@95.735,88.63 Q1B.9@96.75,87.3 Q1B.9@96.885,85.97 Q1B.9@96.885,87.3 Q1B.9@96.885,88.63 Q1B.9@98.33,84.928 Q1B.9@98.33,89.673 Q1B.9@98.035,85.97 Q1B.9@98.035,87.3 Q1B.9@98.035,88.63 Q2A.9@111.835,122.67 Q2A.9@111.835,124 Q2A.9@111.835,125.33 Q2A.9@112.85,124 Q2A.9@112.985,122.67 Q2A.9@112.985,124 Q2A.9@112.985,125.33 Q2A.9@114.43,121.628 Q2A.9@114.43,126.373 Q2A.9@114.135,122.67 Q2A.9@114.135,124 Q2A.9@114.135,125.33 Q2B.9@111.735,86.07 Q2B.9@111.735,87.4 Q2B.9@111.735,88.73 Q2B.9@112.75,87.4 Q2B.9@112.885,86.07 Q2B.9@112.885,87.4 Q2B.9@112.885,88.73 Q2B.9@114.33,85.028 Q2B.9@114.33,89.773 Q2B.9@114.035,86.07 Q2B.9@114.035,87.4 Q2B.9@114.035,88.73 Q3A.9@95.735,111.47 Q3A.9@95.735,112.8 Q3A.9@95.735,114.13 Q3A.9@96.75,112.8 Q3A.9@96.885,111.47 Q3A.9@96.885,112.8 Q3A.9@96.885,114.13 Q3A.9@98.33,110.428 Q3A.9@98.33,115.173 Q3A.9@98.035,111.47 Q3A.9@98.035,112.8 Q3A.9@98.035,114.13 Q3B.9@95.735,74.97 Q3B.9@95.735,76.3 Q3B.9@95.735,77.63 Q3B.9@96.75,76.3 Q3B.9@96.885,74.97 Q3B.9@96.885,76.3 Q3B.9@96.885,77.63 Q3B.9@98.33,73.928 Q3B.9@98.33,78.673 Q3B.9@98.035,74.97 Q3B.9@98.035,76.3 Q3B.9@98.035,77.63 Q4A.9@111.735,111.57 Q4A.9@111.735,112.9 Q4A.9@111.735,114.23 Q4A.9@112.75,112.9 Q4A.9@112.885,111.57 Q4A.9@112.885,112.9 Q4A.9@112.885,114.23 Q4A.9@114.33,110.528 Q4A.9@114.33,115.272 Q4A.9@114.035,111.57 Q4A.9@114.035,112.9 Q4A.9@114.035,114.23 Q4B.9@111.735,74.97 Q4B.9@111.735,76.3 Q4B.9@111.735,77.63 Q4B.9@112.75,76.3 Q4B.9@112.885,74.97 Q4B.9@112.885,76.3 Q4B.9@112.885,77.63 Q4B.9@114.33,73.928 Q4B.9@114.33,78.672 Q4B.9@114.035,74.97 Q4B.9@114.035,76.3 Q4B.9@114.035,77.63 Q5A.9@95.735,100.47 Q5A.9@95.735,101.8 Q5A.9@95.735,103.13 Q5A.9@96.75,101.8 Q5A.9@96.885,100.47 Q5A.9@96.885,101.8 Q5A.9@96.885,103.13 Q5A.9@98.33,99.427 Q5A.9@98.33,104.172 Q5A.9@98.035,100.47 Q5A.9@98.035,101.8 Q5A.9@98.035,103.13 Q5B.9@95.735,63.97 Q5B.9@95.735,65.3 Q5B.9@95.735,66.63 Q5B.9@96.75,65.3 Q5B.9@96.885,63.97 Q5B.9@96.885,65.3 Q5B.9@96.885,66.63 Q5B.9@98.33,62.927 Q5B.9@98.33,67.672 Q5B.9@98.035,63.97 Q5B.9@98.035,65.3 Q5B.9@98.035,66.63 Q6A.9@111.835,100.57 Q6A.9@111.835,101.9 Q6A.9@111.835,103.23 Q6A.9@112.85,101.9 Q6A.9@112.985,100.57 Q6A.9@112.985,101.9 Q6A.9@112.985,103.23 Q6A.9@114.43,99.528 Q6A.9@114.43,104.273 Q6A.9@114.135,100.57 Q6A.9@114.135,101.9 Q6A.9@114.135,103.23 Q6B.9@111.735,63.97 Q6B.9@111.735,65.3 Q6B.9@111.735,66.63 Q6B.9@112.75,65.3 Q6B.9@112.885,63.97 Q6B.9@112.885,65.3 Q6B.9@112.885,66.63 Q6B.9@114.33,62.927 Q6B.9@114.33,67.672 Q6B.9@114.035,63.97 Q6B.9@114.035,65.3 Q6B.9@114.035,66.63 U1A.2 U1A.3 U1A.4 U1A.8 U1A.33 U1A.40 U1A.50 U1A.51 U1A.52 U1A.54 U1A.55 U1A.56 U1B.2 U1B.3 U1B.4 U1B.8 U1B.9 U1B.11 U1B.20 U1B.23 U1B.24 U1B.25 U1B.33 U1B.40 U1B.50 U1B.51 U1B.52 U1B.54 U1B.55 U1B.56 U1B.58 U1B.59
copper on no net: | length 62.8
  Component Side w0.2: v1(87.7,122.6) 88.2,122.1 ; v1(101.6,135.7) 101.6,135.325 101.8,135.125 101.8,134.592 104.3,134.592 ; 104.3,132.392 104.608,132.7 105.75,132.7 ; 104.3,133.408 104.1,133.608 104.1,134.5 105.75,134.5 ; 104.3,135.6 107.65,135.6 107.65,134.5 109.35,134.5 ; 107.65,132.6 107.65,132.7 108,132.7 108,133.3 108.7,134 110.7,134 111.4,133.3 111.4,132.65 ; 111.4,133.1 113.092,133.1 ; 111.4,134.55 111.4,136.3 114,136.3 114,135.608 114.2,135.408 ; 113,135.408 113,136.3 ; 114.1,134.392 114.1,133.2 116.3,133.2 116.3,132.608 ; 115.55,135.4 v1(115.55,136.1)
  Bottom Layer w0.2: v1(87.7,122.6) 87.1,123.2 87.1,136.7 101.2,136.7 101.6,136.3 v1(101.6,135.7)

## Polygon pours and split planes (outlines as drawn)
V_CHG on Bottom Layer "3 BottomMid-No Net" (solid, remove dead copper, pour order 24): 98.5,121.3 98.5,128.4 93.5,128.4 93.5,136.3 87.5,136.3 87.5,121.3
MB_PHASE_C on Bottom Layer "3 BottomMid-No Net" (solid, remove dead copper, pour order 20): 114.6,62 114.6,68 99.5,68 99.5,62.7 100.2,62
MB_PHASE_B on Bottom Layer "3 BottomMid-No Net" (solid, remove dead copper, pour order 18): 114.6,69 114.6,79.1 99.5,79.1 99.5,69
MB_PHASE_A on Bottom Layer "3 BottomMid-No Net" (solid, remove dead copper, pour order 16): 114.6,80 114.6,90.1 99.5,90.1 99.5,80
MA_PHASE_C on Bottom Layer "3 BottomMid-No Net" (solid, remove dead copper, pour order 14): 114.7,94.8 114.7,104.6 99.6,104.6 99.6,94.8
MA_PHASE_B on Bottom Layer "3 BottomMid-No Net" (solid, remove dead copper, pour order 12): 114.7,105.6 114.7,115.6 99.6,115.6 99.6,105.6
MA_PHASE_A on Bottom Layer "3 BottomMid-No Net" (solid, remove dead copper, pour order 10): 114.7,116.6 114.7,126.7 99.6,126.7 99.6,116.6
V_SUPPLY on Bottom Layer "3 BottomMid-No Net" (solid, remove dead copper, pour order 6): 120,61.4 99.4,61.4 98.7,62.1 98.7,120.1 87.5,120.1 87.5,56.4 90,53.9 121.7,53.9 121.7,59.7
GND on Bottom Layer "3 BottomMid-No Net" (solid, remove dead copper, pour order 3): 131.7,133.4 157.1,133.4 157.1,56.7 154.3,53.9 128.86,53.9 128.86,130.56
GND on Bottom Layer "3 BottomMid-No Net" (solid, remove dead copper, pour order 2): 122.9,53.9 121.975,53.9 122.014,60.286 115.9,66.4 115.9,126.8 113.7,129 94.2,129 94.2,136.9 129,136.9 129,133 127.2,131.2 127.2,69.03 128,68.196 128,53.9
V_CHG on Component Side "3 BottomMid-No Net" (solid, remove dead copper, pour order 1): 87.5,136.9 157.1,136.9 157.1,132.8 138,132.8 138,128.4 87.5,128.4
GND on Component Side "3 BottomMid-No Net" (solid, remove dead copper, pour order 22): 127.83,132.4 157.1,132.4 157.1,56.7 154.3,53.9 128.4,53.9 128.4,57.87 127.83,58.44
VCC_3V3 on Component Side "3 BottomMid-No Net" (solid, remove dead copper, pour order 0): 131,113.9 150.2,113.9 150.2,66.6 144.5,60.9 131,60.9

## Other copper
Component Side:
  rectangle net GND: 115.9,96.2 125.1,98.9
  rectangle net V_SUPPLY: 144.26,123.8 146.76,124.8
  rectangle net NetC21A_2: 145.4,121.4 145.9,123.2
  region net V_SUPPLY: 87.5,63.1 98.6,63.1 98.6,62.2 99.4,61.4 118.8,61.4 cw(c118.8,58.55) 121.65,58.55 121.65,53.9 90,53.9 87.5,56.4
  region net V_CHG: 88.6,133.9 89.8,133.9 89.8,135.2 90.7,135.2 90.7,133.9 91.9,133.9 91.9,132.9 90.7,132.9 90.7,131.7 89.8,131.7 89.8,132.9 88.6,132.9
  region net V_SUPPLY: 115.5,93.5 114.7,94.3 98.5,94.3 98.5,91 125.2,91 126.7,92.5 126.7,93.5
  region net V_CHG: 98.5,121.3 89.1,121.3 89.1,124 87.5,124 87.5,130.4 98.5,130.4
  region net MB_PB_AGND: 123.3,80.15 123.3,78.9 123.9,78.3 125.3,78.3 125.8,77.8 125.8,73.6 125.3,73.1 123.9,73.1 123.3,72.5 123.3,71.7 118.3,71.7 115.9,74.1 115.9,77.4 117.4,77.4 117.4,79.3 118.25,80.15
  region net MA_PHASE_C: 101.25,103.05 99.6,103.05 99.6,94.8 114.7,94.8 114.7,104.6 102.8,104.6
  region net MA_PC_SOURCE: 123.4,99.6 115.9,99.6 115.9,103 123.4,103
  region net MA_PHASE_B: 101.15,114.05 99.6,114.05 99.6,105.6 114.8,105.6 114.8,115.6 102.7,115.6
  region net MA_PHASE_A: 101.15,125.15 99.8,125.15 99.8,116.6 114.8,116.6 114.8,126.7 102.7,126.7
  region net MA_PA_SOURCE: 123.4,121.7 115.9,121.7 115.9,125.1 123.4,125.1
  region net GND: 123.4,116.75 123.4,115.5 124,114.9 125.4,114.9 126,114.3 126,110.3 125.4,109.7 124,109.7 123.4,109.1 123.4,108.4 118.3,108.4 115.9,110.8 115.9,114 117.6,114 117.6,116 118.35,116.75
  region net V_SUPPLY: 98.6,62.6 98.6,120.1 87.5,120.1 87.5,62.6
  region net MB_PA_SOURCE: 123.3,85.1 115.9,85.1 115.9,88.5 123.3,88.5
  region net MB_PHASE_A: 101.05,88.55 99.55,88.55 99.55,80 114.6,80 114.6,90.1 102.6,90.1
  region net MB_PHASE_B: 101.05,77.45 99.55,77.45 99.55,69 114.6,69 114.6,79 102.6,79
  region net MB_PC_SOURCE: 123.3,63 115.9,63 115.9,66.4 123.3,66.4
  region net MB_PHASE_C: 101.05,66.45 99.55,66.45 99.55,62.65 100.2,62 114.6,62 114.6,68 102.6,68
Bottom Layer:
  rectangle net V_SUPPLY: 118,53.9 121.7,58.6
  rectangle net MB_PHASE_C: 101.1,63.1 109.2,67.1
  rectangle net V_SUPPLY: 144.26,123.8 146.5,124.8
  region net V_CHG: 97.4,122.6 89.8,122.6 89.8,125.1 88.6,126.3 88.6,134.9 92.2,134.9 92.2,130.5 93.6,129.1 97.4,125.3
  region net V_SUPPLY: 88.6,115.2 97.4,115.2 97.4,61.5 98.9,60 119.6,60 121.725,57.875 121.725,55 92.6,55 88.6,59
  region net V_CHG: 88.6,133.902 89.8,133.902 89.8,135.202 90.7,135.202 90.7,133.902 91.9,133.902 91.9,132.902 90.7,132.902 90.7,131.702 89.8,131.702 89.8,132.902 88.6,132.902
  region net GND: 96.1,133.9 97.3,133.9 97.3,135.2 98.2,135.2 98.2,133.9 99.4,133.9 99.4,132.9 98.2,132.9 98.2,131.7 97.3,131.7 97.3,132.9 96.1,132.9
  region net GND: 127.5,67.7 125.4,69.8 125.4,131.2 128.6,134.4 128.6,135.2 128,135.8 119.6,135.8 118.7,134.9 95.4,134.9 95.4,130.4 114.5,130.4 117.6,127.3 117.6,66.1 122.9,60.8 122.9,53.9 127.5,53.9

## Silkscreen, mask and mechanical layers (free items; w line width, h text height)
Top Overlay:
  lines w0.152: 89.5,135.7 90.9,135.7 ; 90.2,135.1 90.2,136.3 ; 97,135.7 98.5,135.7
  lines w0.5: 84.9,56.1 ccw(c91,56.1) 91,50 97.172,50 cw(c97.172,33.516) 108.828,45.172 117.172,36.828 ccw(c121.586,41.243) 121.586,35 ccw(c121.586,43.243) 127.414,37.414 135.172,45.172 cw(c146.828,33.515) 146.828,50 153,50 ccw(c153,56) 159,56 159,145.9 ccw(c151.9,145.9) 151.9,153 ccw(c151.9,143.585) 145.242,150.242 136.809,141.809 cw(c130.027,148.591) 130.027,139 114.031,139 cw(c114.031,148.733) 107.149,141.851 98.899,150.101 ccw(c91.9,143.103) 91.9,153 ccw(c91.9,146) 84.9,146 84.9,56.1